# Altium PCB FMCWRev2.PcbDoc
Units mil, origin at the board's own origin, x right, y up, seen from the top; angles counter-clockwise.
Board outline 3805 x 2115 mil, 4 copper layers (Top Layer, GND, PWR, Bottom Layer), stack 26.634 mil thick; 68 components, 38 nets, 335 pads, 169 vias.
Unrouted connection lines stored in the file: 64.
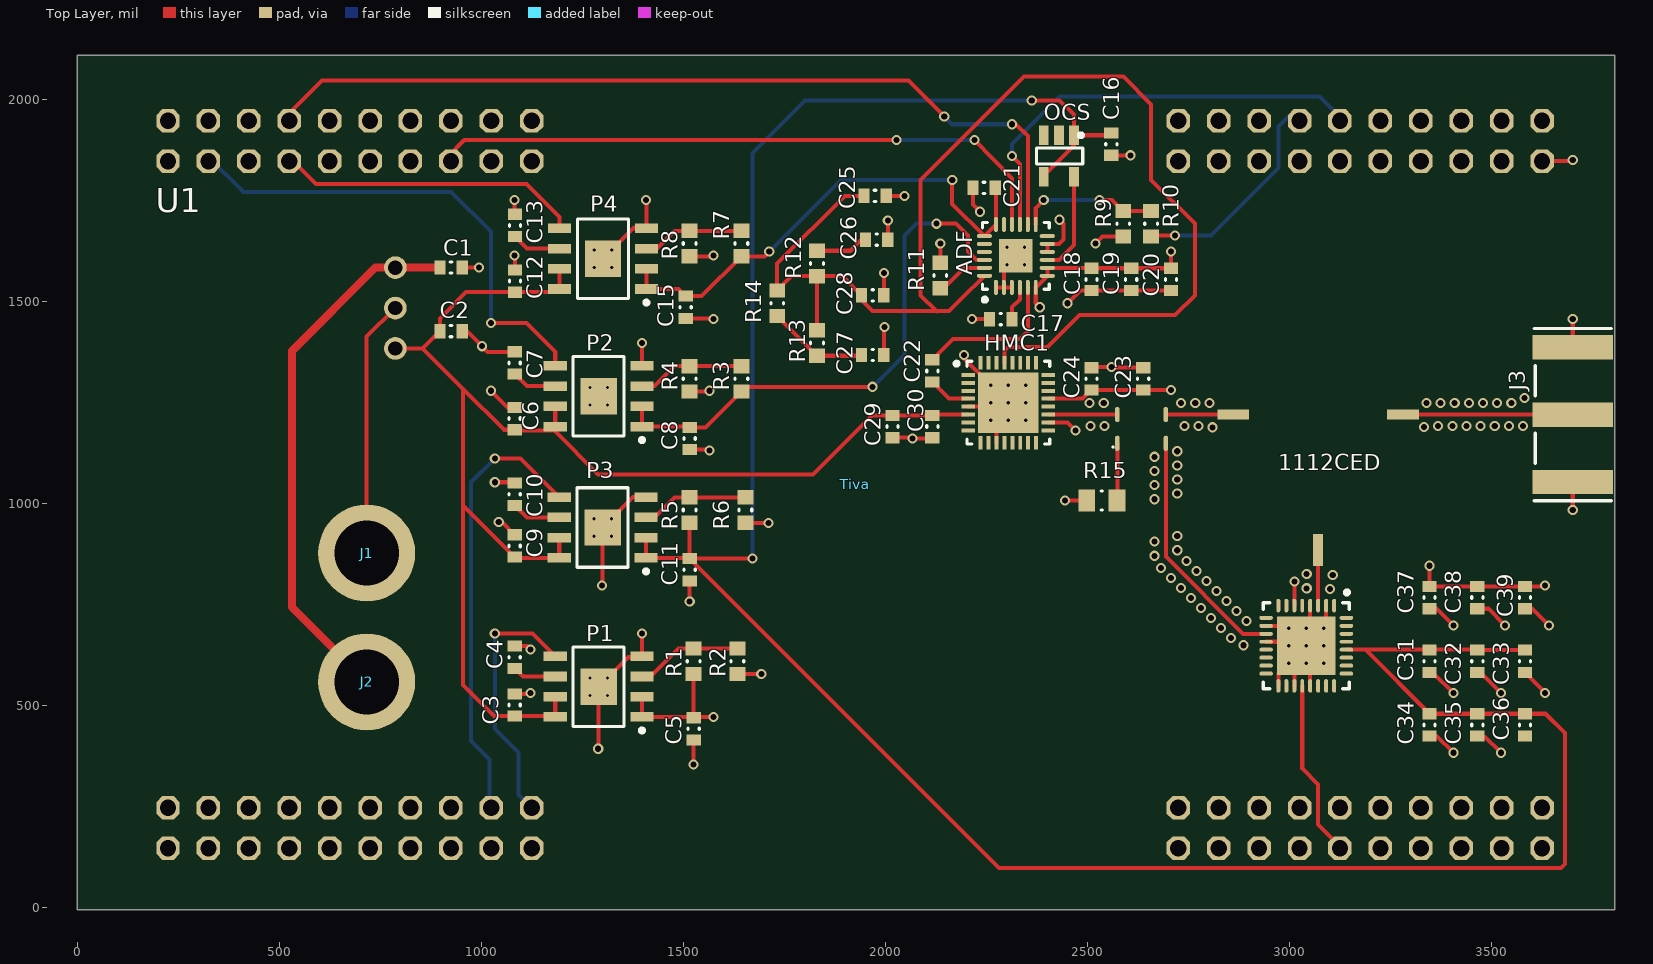
[diagram p0: Top Layer view]
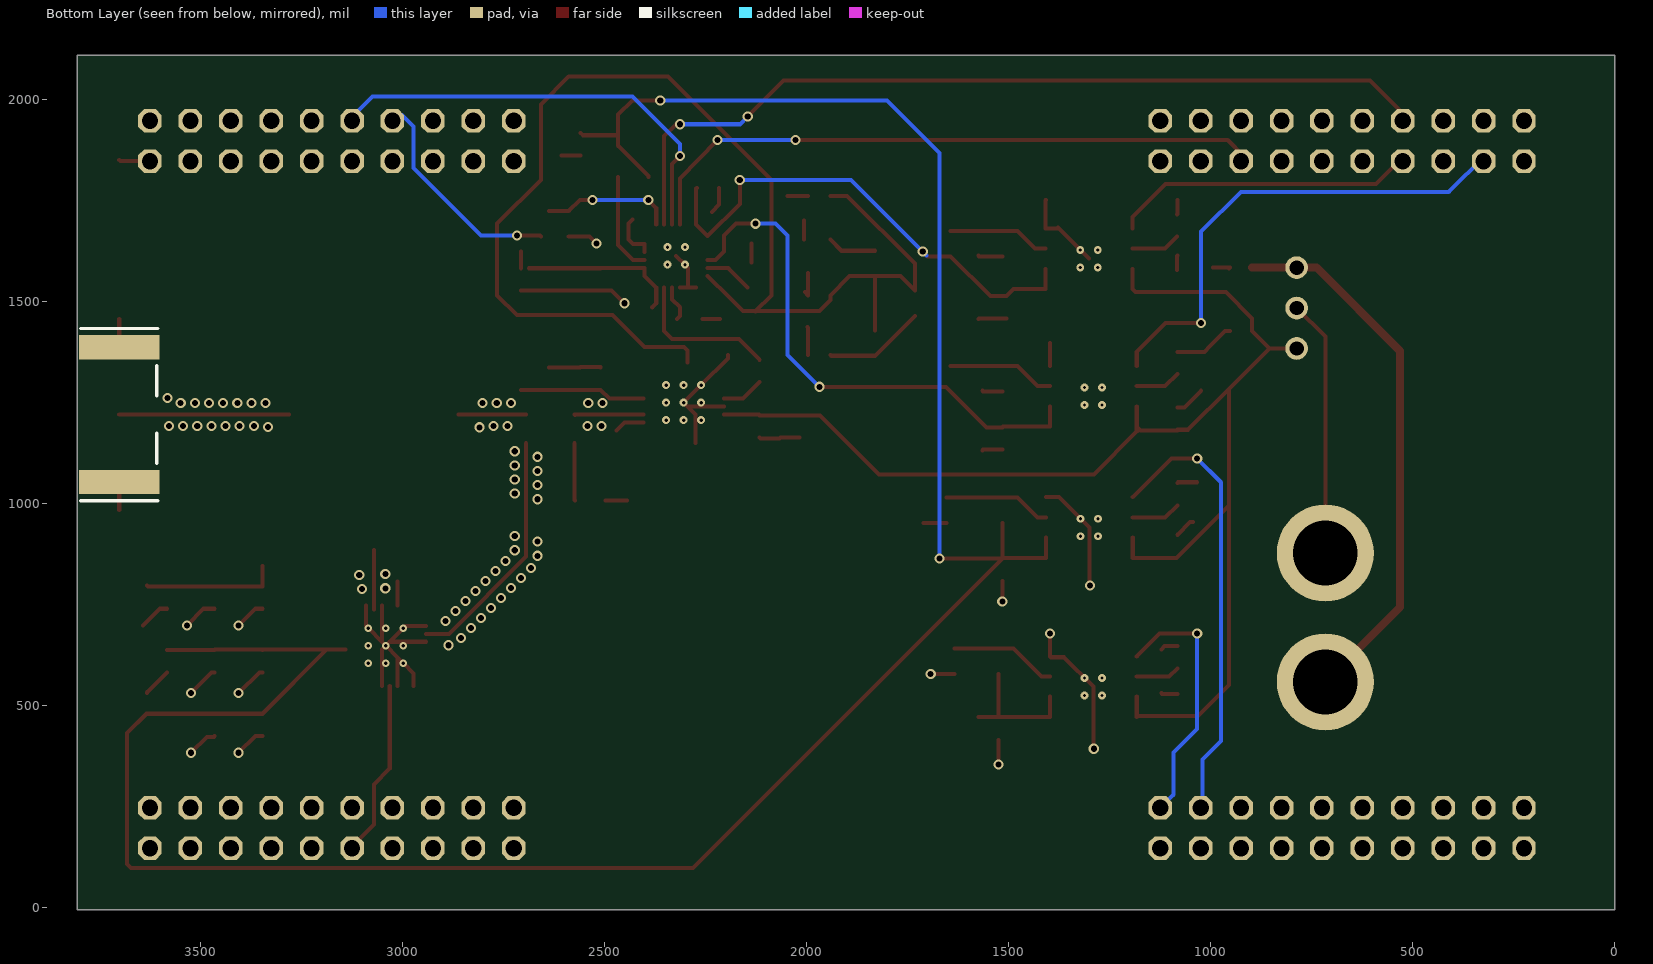
[diagram p1: Bottom Layer view, seen from below]
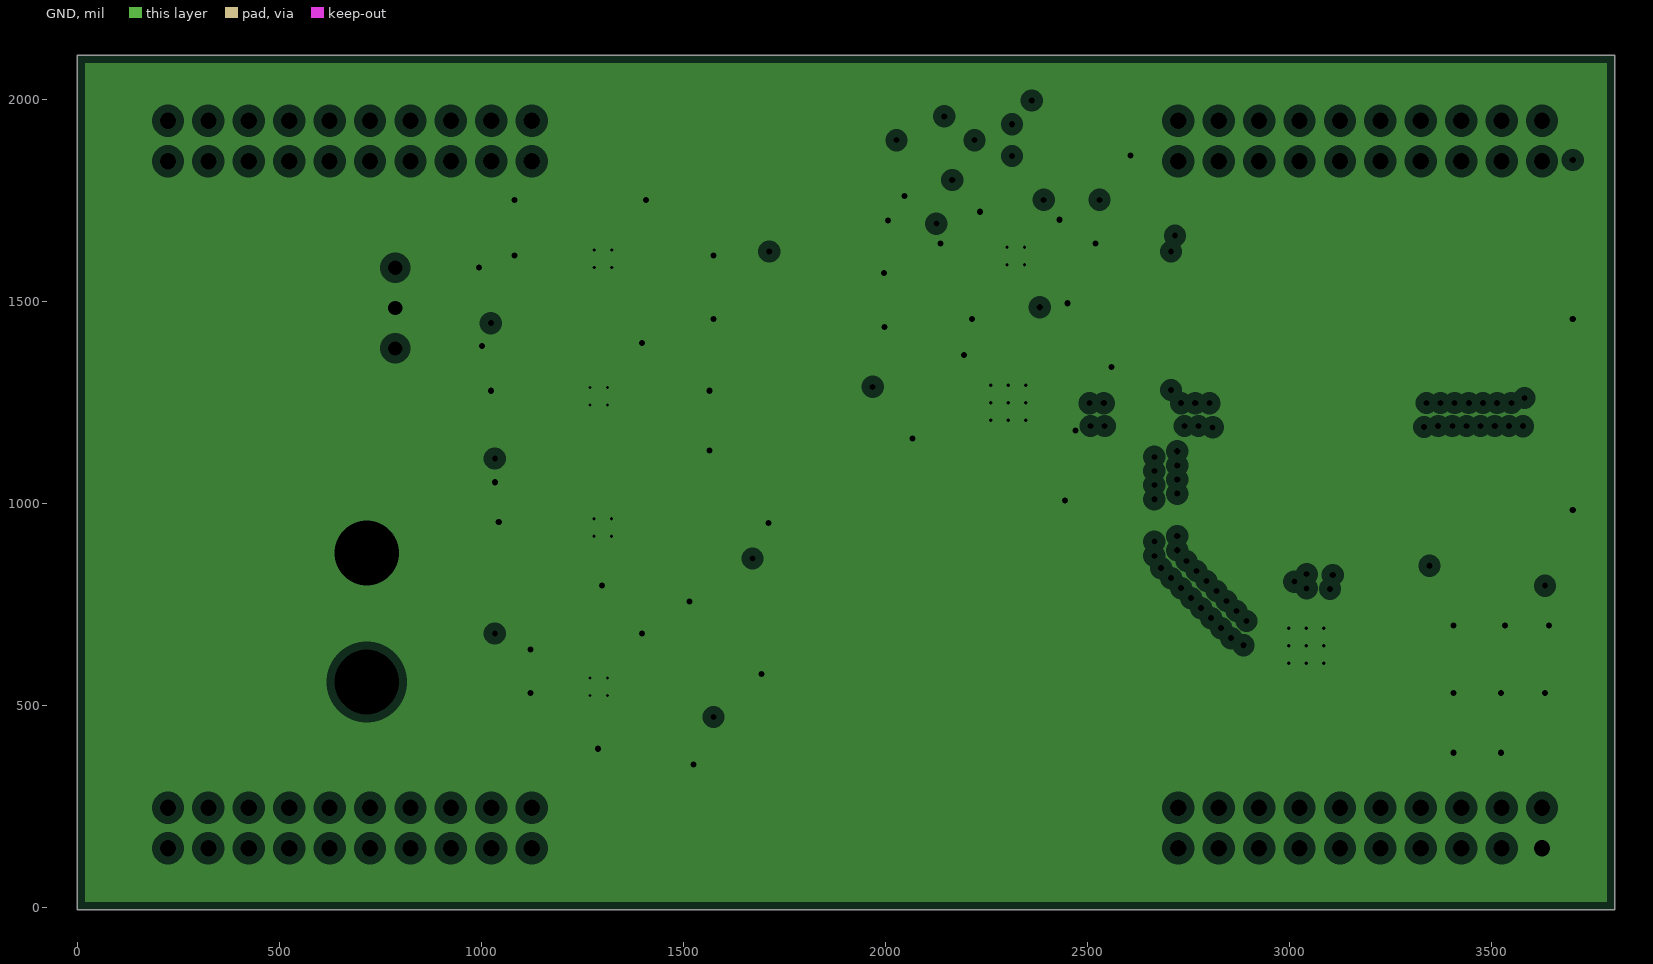
[diagram p2: GND, clearances drawn from the general rule]
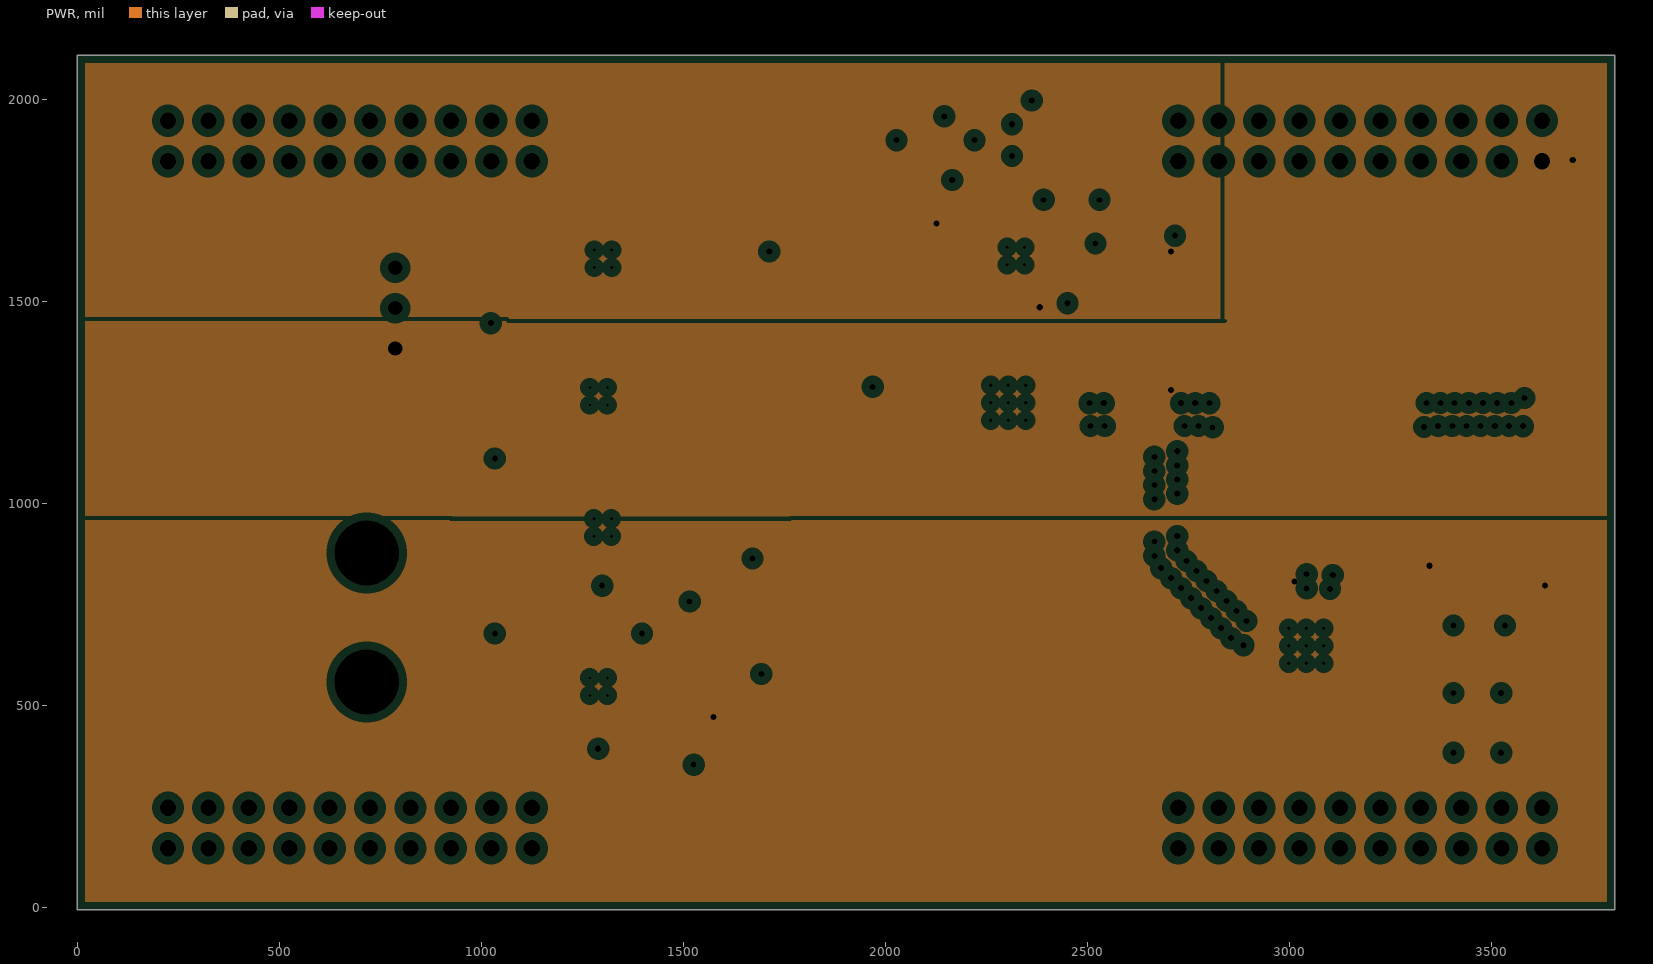
[diagram p3: PWR, clearances drawn from the general rule]

## Layer stack, top to bottom
Top Solder: solder mask 0.4, Solder Resist, Dk 3.5
Top Layer: signal copper 1.4
Dielectric 1: core 8, FR-4, Dk 4.2
GND: plane copper 1.417, net GND
Dielectric 3: prepreg 5, FR-4, Dk 4.2
PWR: plane copper 1.417, net 12V
Dielectric 2: core 8, FR-4, Dk 4.2
Bottom Layer: signal copper 1.4
Bottom Solder: solder mask 0.4, Solder Resist, Dk 3.5

## Board outline
0,-5 3805,-5 3805,2110 0,2110

## Design rules (kind name [scope] priority, off if disabled: settings)
Clearance [All] p1: gap=1 ignorepadtopadclearanceinfootprint=TRUE
ComponentClearance [All] p1: gap=0 collisioncheckmode=3 verticalgap=0 showdistances=FALSE
PlaneClearance [All] p1: clearance=20
PlaneConnect [All] p1: planeconnectstyle=Direct reliefexpansion=20 reliefentries=4 reliefconductorwidth=10 reliefairgap=10
PolygonConnect [All] p1: connectstyle=Direct reliefconductorwidth=10 reliefentries=4 polygonreliefangle="90 Angle" airgapwidth=10
RoomDefinition Sheet1 [InComponentClass('Sheet1')] p1: confinementstyle=ConfineIn formatcopy=TRUE lockcomponents=FALSE outline -1340,-1005 660,-1005 660,-5 -1340,-5
RoomDefinition Sheet3 [InComponentClass('Sheet3')] p2: confinementstyle=ConfineIn formatcopy=TRUE lockcomponents=FALSE outline -1340,-1005 660,-1005 660,-5 -1340,-5
RoomDefinition Sheet2 [InComponentClass('Sheet2')] p3: confinementstyle=ConfineIn formatcopy=TRUE lockcomponents=FALSE outline 4565,5225 9990,5225 9990,5595 4565,5595
RoutingVias [All] p1: holewidth=15 width=25 viastyle="Through Hole" minholewidth=10 minwidth=15 maxholewidth=20 maxwidth=25
SolderMaskExpansion [All] p1: expansion=4
Width Width_2 [(InNet('Antenna') AND InNet('IF') AND InNet('LO') AND InNet('RFOUT') AND InNet('RF') AND InNet('OUT') AND InNet('LOAD'))] p1: maxlimit=11.38 minlimit=11.38 preferedwidth=11.38 impedancedriven=TRUE minimp=50.000000 maximp=50.000000 favimp=50.000000
Width Width_1 [InNet('12V')] p2: maxlimit=19.68 minlimit=9.84 preferedwidth=19.68
Width [All] p3: maxlimit=10 minlimit=10 preferedwidth=10
27 further rules are at their usual default settings.

## Classes and differential pairs
component class Sheet1: C1 C2 C3 C4 C5 C6 C7 C8 C9 C10 C11 C12 C13 C15 J1 J2 P1 P2 P3 P4 R1 R2 R3 R4 R5 R6 R7 R8 Tiva U1
component class Sheet2: ADF C16 C17 C18 C19 C20 C21 C22 C23 C24 C25 C26 C27 C28 C29 C30 HMC1 OCS R9 R10 R11 R12 R13 R14
component class Sheet3: 1 2 1112CED C31 C32 C33 C34 C35 C36 C37 C38 C39 J3 R15

## Components (designator, comment, footprint, x,y, rotation, side; value= is the part's Value field where it differs from the comment)
1 "FPC06077" FPC06077 2633.86,1185.04 r90 top
2 "HMC1113" QFN50P500X500X5_HS-33N 3041.34,648.62 r270 top
1112CED "" PCBComponent_1 3070.87,1210.83 r0 top
ADF "ADF4159" QFN50P400X400X80_HS-25N 2322.83,1613.19 r90 top
C1 "CAP 10uF 16V 0603(1608)" CAPC0603(1608)100_L 925.2,1584.65 r0 top value=10uF
C2 "CAP 22uF 16V 0603(1608)" CAPC0603(1608)100_L 925.2,1427.17 r0 top value=22uF
C3 "CAP 2.2uF 16V 0603(1608)" CAPC0603(1608)100_L 1082.68,501.97 r90 top value=2.2uF
C4 "CAP 1nF 16V 0603(1608)" CAPC0603(1608)100_L 1082.68,620.08 r90 top value=1nF
C5 "CAP 2.2uF 16V 0603(1608)" CAPC0603(1608)100_L 1525.59,442.91 r270 top value=2.2uF
C6 "CAP 2.2uF 16V 0603(1608)" CAPC0603(1608)100_L 1082.68,1210.63 r90 top value=2.2uF
C7 "CAP 1nF 16V 0603(1608)" CAPC0603(1608)100_L 1082.68,1348.43 r90 top value=1nF
C8 "CAP 2.2uF 16V 0603(1608)" CAPC0603(1608)100_L 1515.75,1161.42 r270 top value=2.2uF
C9 "CAP 2.2uF 16V 0603(1608)" CAPC0603(1608)100_L 1082.68,895.67 r90 top value=2.2uF
C10 "CAP 1nF 16V 0603(1608)" CAPC0603(1608)100_L 1082.68,1023.62 r90 top value=1nF
C11 "CAP 2.2uF 16V 0603(1608)" CAPC0603(1608)100_L 1515.75,836.61 r270 top value=2.2uF
C12 "CAP 2.2uF 16V 0603(1608)" CAPC0603(1608)100_L 1083.66,1550.98 r90 top value=2.2uF
C13 "CAP 1nF 16V 0603(1608)" CAPC0603(1608)100_L 1083.66,1688.78 r90 top value=1nF
C15 "CAP 2.2uF 16V 0603(1608)" CAPC0603(1608)100_L 1505.91,1486.22 r270 top value=2.2uF
C16 "CAP 0.1uF 16V 0603(1608)" CAPC0603(1608)100_L 2559.06,1889.76 r270 top value=0.1uF
C17 "CAP 100pF 16V 0603(1608)" CAPC0603(1608)100_L 2285.43,1456.69 r180 top value=100pF
C18 "CAP 10uF 16V 0603(1608)" CAPC0603(1608)100_L 2509.84,1555.12 r270 top value=10uF
C19 "CAP 10uF 16V 0603(1608)" CAPC0603(1608)100_L 2608.27,1555.12 r270 top value=10uF
C20 "CAP 10uF 16V 0603(1608)" CAPC0603(1608)100_L 2706.69,1555.12 r270 top value=10uF
C21 "CAP 10uF 16V 0603(1608)" CAPC0603(1608)100_L 2244.09,1781.5 r180 top value=10uF
C22 "CAP 1000pF 16V 0603(1608)" CAPC0603(1608)100_L 2116.14,1328.74 r270 top value=1000pF
C23 "CAP 2.2uF 16V 0603(1608)" CAPC0603(1608)100_L 2637.8,1309.06 r270 top value=2.2uF
C24 "CAP 100pF 16V 0603(1608)" CAPC0603(1608)100_L 2509.84,1309.06 r270 top value=100pF
C25 "CAP 360pF 16V 0603(1608)" CAPC0603(1608)100_L 1974.41,1761.81 r0 top value=390pF
C26 "CAP 5.6nF 16V 0603(1608)" CAPC0603(1608)100_L 1978.35,1653.54 r180 top value=5.6nF
C27 "CAP 270pF 16V 0603(1608)" CAPC0603(1608)100_L 1968.5,1368.11 r180 top value=270pF
C28 "CAP 270pF 16V 0603(1608)" CAPC0603(1608)100_L 1968.5,1515.75 r180 top value=270pF
C29 "CAP 2.2uF 16V 0603(1608)" CAPC0603(1608)100_L 2017.72,1190.94 r90 top value=2.2uF
C30 "CAP 100pF 16V 0603(1608)" CAPC0603(1608)100_L 2116.14,1190.94 r90 top value=100pF
C31 "CAP 2.2uF 16V 0603(1608)" CAPC0603(1608)100_L 3346.46,610.24 r270 top value=2.2uF
C32 "CAP 10nF 16V 0603(1608)" CAPC0603(1608)100_L 3464.57,610.24 r270 top value=10nF
C33 "CAP 100pF 16V 0603(1608)" CAPC0603(1608)100_L 3582.68,610.24 r270 top value=100pF
C34 "CAP 2.2uF 16V 0603(1608)" CAPC0603(1608)100_L 3346.46,452.76 r270 top value=2.2uF
C35 "CAP 10nF 16V 0603(1608)" CAPC0603(1608)100_L 3464.57,452.76 r270 top value=10nF
C36 "CAP 100pF 16V 0603(1608)" CAPC0603(1608)100_L 3582.68,452.76 r270 top value=100pF
C37 "CAP 100pF 16V 0603(1608)" CAPC0603(1608)100_L 3346.46,767.72 r270 top value=100pF
C38 "CAP 10nF 16V 0603(1608)" CAPC0603(1608)100_L 3464.57,767.72 r270 top value=10nF
C39 "CAP 2.2uF 16V 0603(1608)" CAPC0603(1608)100_L 3582.68,767.72 r270 top value=2.2uF
HMC1 "Component_1" QFN50P500X500X100_HS-33N 2304.13,1250 r0 top
J1 "http://www.powerwerx.com/anderson-powerpoles/" APP45_PCB_HORIZ_RIGHT -393.46,721.7 r0 top
J2 "http://www.powerwerx.com/anderson-powerpoles/" APP45_PCB_HORIZ_RIGHT -393.46,402.81 r0 top
J3 "CONSMA003.062-L" CON-SMA-EDGE062L 3700.79,1220.47 r0 top
OCS "LTC6905IS5-100" TSOP95P280X100-5N 2431.1,1860.24 r270 top
P1 "ADP7142" SOIC127P600X175_HS-9N 1290.35,547.44 r180 top
P2 "ADP7142" SOIC127P600X175_HS-9N 1290.35,1265.94 r180 top
P3 "ADP7142" SOIC127P600X175_HS-9N 1300.2,941.14 r180 top
P4 "ADP7142" SOIC127P600X175_HS-9N 1301.18,1606.3 r180 top
R1 "500 1% 0603(1608)" RESC0603(1608)_N 1525.59,610.24 r270 top value="500 Ohm"
R2 "215 1% 0603(1608)" RESC0603(1608)_N 1633.86,610.24 r90 top value="215 Ohm"
R3 "500 1% 0603(1608)" RESC0603(1608)_N 1643.7,1309.06 r270 top value="500 Ohm"
R4 "287 1% 0603(1608)" RESC0603(1608)_N 1515.75,1309.06 r90 top value="287 Ohm"
R5 "500 1% 0603(1608)" RESC0603(1608)_N 1515.75,984.25 r270 top value="500 Ohm"
R6 "332 1% 0603(1608)" RESC0603(1608)_N 1653.54,984.25 r90 top value="332 Ohm"
R7 "1000 1% 0603(1608)" RESC0603(1608)_N 1643.7,1643.7 r270 top value="1000 Ohm"
R8 "500 1% 0603(1608)" RESC0603(1608)_N 1515.75,1643.7 r90 top value="500 Ohm"
R9 "120 1% 0603(1608)" RESC0603(1608)_N 2588.58,1692.91 r90 top value="120 Ohm"
R10 "100 1% 0603(1608)" RESC0603(1608)_N 2657.48,1692.91 r270 top value="100 Ohm"
R11 "5100 1% 0603(1608)" RESC0603(1608)_N 2135.83,1564.96 r90 top value="5100 Ohm"
R12 "330 1% 0603(1608)" RESC0603(1608)_N 1830.71,1594.49 r270 top value="330 Ohm"
R13 "180 1% 0603(1608)" RESC0603(1608)_N 1830.71,1397.64 r270 top value="180 Ohm"
R14 "180 1% 0603(1608)" RESC0603(1608)_N 1732.28,1496.06 r90 top value="180 Ohm"
R15 "50R 5% 0805(2012)" RESC0805(2012)_N 2535.43,1007.87 r0 top value="50 Ohm"
Tiva "TIVA C CONNECTED LAUNCHPAD" TIVA-C-CONNECTED -1225.2,-202.36 r0 top
U1 "4.95W DC/DC Converter    Manufacturer: Murata" OKI-78SR_HORIZ 787.4,1584.25 r90 top

## Footprints (in the part's own frame and the unit in brackets; to place one, negate y for a bottom-side part, rotate by r counter-clockwise, add the part's x,y. Pads: shape width x height; smd on the part's side, far side on the other; paste and mask are expansions set on the pad)
APP45_PCB_HORIZ_RIGHT [mil]
  round 240 hole 160: P$1(1110,156.25)
CAPC0603(1608)100_L [mm] "Chip Capacitor, Body 1.6x0.8mm, Height 1.0mm, IPC High Density"
  rect 0.7x0.9 smd: 1(-0.7,0) 2(0.7,0)
  silkscreen extent -0.05,-0.35 0.05,0.35, body extent -0.87,-0.47 0.88,0.48, height 1
CON-SMA-EDGE062L [mil] "Connector, SMA Female Edge Mount for 0.062\" Thick Board, Extended, 5-Lead, Body 9.5x7.9mm"
  rect 200x60 smd: 1(0,0) 2(0,-167) 5(0,167)
  rect 200x60 smd far side: 3(0,-167) 4(0,167)
  silkscreen extent -96,-213 96,213, body extent -93,-195 931,195, height 179
FPC06077 [mil] "Chip Array, Concave, 4-Leads, Pitch 3.05mm,  Body 3.20x1.60mm,  IPC Medium Density"
  oval 37.4x12 smd: 1(35.43,60) 2(35.43,-60) 3(-35.43,-60) 4(-35.43,60)
  silkscreen extent -47,68 -43,72, body extent -37,-67 37,67, height 24
OKI-78SR_HORIZ [mil]
  round 56 hole 35.43: 1(0,0) 2(-100,0) 3(-200,0)
PCBComponent_1 [mm]
  rect 2x0.63 smd: 1(-5.334,0.254) 2(5.334,0.254)
  rect 0.63x2 smd: 3(0,-8.255)
QFN50P400X400X80_HS-25N [mm] "QFN, 24-Leads, Body 4.00x4.00mm, Pitch 0.50mm, Thermal Pad 2.10x2.10mm, IPC Medium Density"
  oval 0.95x0.25 smd: 1(-1.975,1.25) 2(-1.975,0.75) 3(-1.975,0.25) 4(-1.975,-0.25) 5(-1.975,-0.75) 6(-1.975,-1.25) 13(1.975,-1.25) 14(1.975,-0.75) 15(1.975,-0.25) 16(1.975,0.25) 17(1.975,0.75) 18(1.975,1.25)
  oval 0.25x0.95 smd: 7(-1.25,-1.975) 8(-0.75,-1.975) 9(-0.25,-1.975) 10(0.25,-1.975) 11(0.75,-1.975) 12(1.25,-1.975) 19(1.25,1.975) 20(0.75,1.975) 21(0.25,1.975) 22(-0.25,1.975) 23(-0.75,1.975) 24(-1.25,1.975)
  rect 2.1x2.1 smd: 25(0,0)
  silkscreen extent -2.87,-2.1 2.1,2.1, body extent -1.97,-1.97 1.97,1.97, height 0.8
QFN50P500X500X5_HS-33N [mm] "QFN, 32-Leads, Body 5.00x5.00mm, Pitch 0.50mm, Thermal Pad 3.65x3.65mm, IPC Medium Density"
  oval 0.85x0.25 smd: 1(-2.525,1.75) 2(-2.525,1.25) 3(-2.525,0.75) 4(-2.525,0.25) 5(-2.525,-0.25) 6(-2.525,-0.75) 7(-2.525,-1.25) 8(-2.525,-1.75) 17(2.525,-1.75) 18(2.525,-1.25) 19(2.525,-0.75) 20(2.525,-0.25) 21(2.525,0.25) 22(2.525,0.75) 23(2.525,1.25) 24(2.525,1.75)
  oval 0.25x0.85 smd: 9(-1.75,-2.525) 10(-1.25,-2.525) 11(-0.75,-2.525) 12(-0.25,-2.525) 13(0.25,-2.525) 14(0.75,-2.525) 15(1.25,-2.525) 16(1.75,-2.525) 25(1.75,2.525) 26(1.25,2.525) 27(0.75,2.525) 28(0.25,2.525) 29(-0.25,2.525) 30(-0.75,2.525) 31(-1.25,2.525) 32(-1.75,2.525)
  rect 3.65x3.65 smd: 33(0,0)
  silkscreen extent -3.47,-2.7 2.7,2.7, body extent -2.55,-2.55 2.55,2.55, height 0.2
QFN50P500X500X100_HS-33N [mm] "QFN, 32-Leads, Body 5.00x5.00mm, Pitch 0.50mm, Thermal Pad 3.80x3.80mm, IPC Medium Density"
  rect 0.85x0.25 smd: 1(-2.525,1.75) 2(-2.525,1.25) 3(-2.525,0.75) 4(-2.525,0.25) 5(-2.525,-0.25) 6(-2.525,-0.75) 7(-2.525,-1.25) 8(-2.525,-1.75) 17(2.525,-1.75) 18(2.525,-1.25) 19(2.525,-0.75) 20(2.525,-0.25) 21(2.525,0.25) 22(2.525,0.75) 23(2.525,1.25) 24(2.525,1.75)
  rect 0.25x0.85 smd: 9(-1.75,-2.525) 10(-1.25,-2.525) 11(-0.75,-2.525) 12(-0.25,-2.525) 13(0.25,-2.525) 14(0.75,-2.525) 15(1.25,-2.525) 16(1.75,-2.525) 25(1.75,2.525) 26(1.25,2.525) 27(0.75,2.525) 28(0.25,2.525) 29(-0.25,2.525) 30(-0.75,2.525) 31(-1.25,2.525) 32(-1.75,2.525)
  rect 3.8x3.8 smd: 33(0,0)
  silkscreen extent -3.37,-2.6 2.6,2.6, body extent -2.45,-2.45 2.45,2.45, height 1
RESC0603(1608)_N [mm] "Chip Resistor, Body 1.6x0.8mm, IPC Medium Density"
  rect 0.9x1 smd: 1(-0.8,0) 2(0.8,0)
  silkscreen extent -0.05,-0.4 0.05,0.4, body extent -0.85,-0.47 0.85,0.47, height 0.6
RESC0805(2012)_N [mm] "Chip Resistor, Body 2.0x1.3mm, IPC Medium Density"
  rect 1.05x1.4 smd: 1(-0.95,0) 2(0.95,0)
  silkscreen extent -0.05,-0.6 0.05,0.6, body extent -1.1,-0.67 1.1,0.68, height 0.7
SOIC127P600X175_HS-9N [mm] "SOIC, 8-Leads, Body 4.90x3.90mm, Pitch 1.27mm, Thermal Pad 2.29x2.29mm, IPC Medium Density"
  rect 1.45x0.6 smd: 1(-2.725,1.905) 2(-2.725,0.635) 3(-2.725,-0.635) 4(-2.725,-1.905) 5(2.725,-1.905) 6(2.725,-0.635) 7(2.725,0.635) 8(2.725,1.905)
  rect 2.29x2.29 smd: 9(0,0)
  silkscreen extent -2.85,-2.5 1.6,2.88, body extent -3,-2.5 3,2.5, height 1.75
TIVA-C-CONNECTED [mil]
  oct 58.09x58.09 hole 40: +3V3_1(2350,2150) +3V3_2(4850,2150) +5V_1(2350,2050) +5V_2(4850,2050) GND_1(2250,2050) GND_2(2350,350) GND_3(4750,2050) GND_4(4850,350) PA4(1550,2050) PA5(1450,2050) PA6(4150,2050) PA7(2050,350) PB2(4050,2150) PB3(3950,2150) PB4(2150,2050) PB5(2050,2050) PC4(4650,2150) PC5(4550,2150) PC6(4450,2150) PC7(4150,2150) PD0(4250,350) PD1(4350,350) PD2(2250,2150) PD3(4250,2150) PD4(1950,2150) PD5(1850,2150) PD7(4250,2050) PE0(4650,2050) PE1(4550,2050) PE2(4450,2050) PE3(4350,2050) PE4(4750,2150) PE5(4350,2150) PF1(4850,450) PF2(4750,450) PF3(4650,450) PG0(4550,450) PG1(2350,450) PH0(1750,450) PH1(1650,450) PH2(4650,350) PH3(4550,350) PK0(1950,2050) PK1(1850,2050) PK2(1750,2050) PK3(1650,2050) PK4(2250,450) PK5(2150,450) PK6(1550,450) PK7(1450,450) PL0(4250,450) PL1(4150,450) PL2(4050,450) PL3(3950,450) PL4(4450,450) PL5(4350,450) PM0(2050,450) PM1(1950,450) PM2(1850,450) PM3(4750,350) PM4(4050,2050) PM5(3950,2050) PM6(1450,350) PM7(2250,350) PN2(4150,350) PN3(4050,350) PN4(1450,2150) PN5(1550,2150) PP0(2150,2150) PP1(2050,2150) PP2(3950,350) PP3(1650,350) PP4(1650,2150) PP5(2150,350) PQ0(1750,2150) PQ1(1550,350) PQ2/PA3(1850,350) PQ3/PA2(1750,350) RST1(1950,350) RST_2(4450,350)
TSOP95P280X100-5N [mm] "TSOP, 5-Leads, Body 2.90x1.63mm, Pitch 0.95mm, IPC Medium Density"
  rect 1.22x0.62 smd: 1(-1.31,0.9) 2(-1.31,-0.05) 3(-1.31,-1) 4(1.31,0.9) 5(1.31,-1)
  silkscreen extent -1.43,-1.45 0.5,1.46, body extent -1.4,-1.45 1.4,1.45, height 1

## Part data
1112CED: library part Component_1
C1 C18 C19 C20 C21: library part CMP-1035-01744-1, "CAP 10uF 16V ±1% 0603 (1608 Metric) Thickness 1mm SMD", Case-EIA=0603, Case-Metric=1608, Rated Voltage="16 V", Tolerance=±1%, Max Thickness="1 mm", Technology=SMT
C2: library part CMP-1035-01744-1, "CAP 22uF 16V ±1% 0603 (1608 Metric) Thickness 1mm SMD", Case-EIA=0603, Case-Metric=1608, Rated Voltage="16 V", Tolerance=±1%, Max Thickness="1 mm", Technology=SMT
C3 C5 C6 C8 C9 C11 C12 C15 C23 C29 C31 C34 C39: library part CMP-1035-01744-1, "CAP 2.2uF 16V ±1% 0603 (1608 Metric) Thickness 1mm SMD", Case-EIA=0603, Case-Metric=1608, Rated Voltage="16 V", Tolerance=±1%, Max Thickness="1 mm", Technology=SMT
C4 C7 C10 C13: library part CMP-1035-01744-1, "CAP 1nF 16V ±1% 0603 (1608 Metric) Thickness 1mm SMD", Case-EIA=0603, Case-Metric=1608, Rated Voltage="16 V", Tolerance=±1%, Max Thickness="1 mm", Technology=SMT
C16: library part CMP-1035-01744-1, "CAP 0.1uF 16V ±1% 0603 (1608 Metric) Thickness 1mm SMD", Case-EIA=0603, Case-Metric=1608, Rated Voltage="16 V", Tolerance=±1%, Max Thickness="1 mm", Technology=SMT
C17 C24 C30 C33 C36 C37: library part CMP-1035-01744-1, "CAP 100pF 16V ±1% 0603 (1608 Metric) Thickness 1mm SMD", Case-EIA=0603, Case-Metric=1608, Rated Voltage="16 V", Tolerance=±1%, Max Thickness="1 mm", Technology=SMT
C22: library part CMP-1035-01744-1, "CAP 1000pF 16V ±1% 0603 (1608 Metric) Thickness 1mm SMD", Case-EIA=0603, Case-Metric=1608, Rated Voltage="16 V", Tolerance=±1%, Max Thickness="1 mm", Technology=SMT
C25: library part CMP-1035-01744-1, "CAP 390pF 16V ±1% 0603 (1608 Metric) Thickness 1mm SMD", Case-EIA=0603, Case-Metric=1608, Rated Voltage="16 V", Tolerance=±1%, Max Thickness="1 mm", Technology=SMT
C26: library part CMP-1035-01744-1, "CAP 5.6nF 16V ±1% 0603 (1608 Metric) Thickness 1mm SMD", Case-EIA=0603, Case-Metric=1608, Rated Voltage="16 V", Tolerance=±1%, Max Thickness="1 mm", Technology=SMT
C27 C28: library part CMP-1035-01744-1, "CAP 270pF 16V ±1% 0603 (1608 Metric) Thickness 1mm SMD", Case-EIA=0603, Case-Metric=1608, Rated Voltage="16 V", Tolerance=±1%, Max Thickness="1 mm", Technology=SMT
C32 C35 C38: library part CMP-1035-01744-1, "CAP 10nF 16V ±1% 0603 (1608 Metric) Thickness 1mm SMD", Case-EIA=0603, Case-Metric=1608, Rated Voltage="16 V", Tolerance=±1%, Max Thickness="1 mm", Technology=SMT
HMC1: "HMC735 IC Schematic", Supplier Part Number 1=1127-1548-ND, Supplier 1=Digi-Key
J1: library part APPPP45_PCB_HORIZ_RIGHT, COLOR1=GN
J2: library part APPPP45_PCB_HORIZ_RIGHT, COLOR1=12V
J3: library part CMP-0168-00039-1, DatasheetVersion="rev1.0, May-2007", PackageReference=CON-SMA-EDGE062L, PackageVersion="rev1.0, May-2007", PCB_Layout="Pads complies with manufacturer's recommendation."
R1 R3 R5 R8: library part CMP-1012-00736-1, "500 0.1W 1% 0603 (1608 Metric)  SMD", Case-EIA=0603, Case-Metric=1608, Power="0.1 W", Tolerance="1 %", Technology=SMT
R2: library part CMP-1012-00736-1, "215 0.1W 1% 0603 (1608 Metric)  SMD", Case-EIA=0603, Case-Metric=1608, Power="0.1 W", Tolerance="1 %", Technology=SMT
R4: library part CMP-1012-00736-1, "287 0.1W 1% 0603 (1608 Metric)  SMD", Case-EIA=0603, Case-Metric=1608, Power="0.1 W", Tolerance="1 %", Technology=SMT
R6: library part CMP-1012-00736-1, "332 0.1W 1% 0603 (1608 Metric)  SMD", Case-EIA=0603, Case-Metric=1608, Power="0.1 W", Tolerance="1 %", Technology=SMT
R7: library part CMP-1012-00736-1, "1000 0.1W 1% 0603 (1608 Metric)  SMD", Case-EIA=0603, Case-Metric=1608, Power="0.1 W", Tolerance="1 %", Technology=SMT
R9: library part CMP-1012-00736-1, "120 0.1W 1% 0603 (1608 Metric)  SMD", Case-EIA=0603, Case-Metric=1608, Power="0.1 W", Tolerance="1 %", Technology=SMT
R10: library part CMP-1012-00736-1, "100 0.1W 1% 0603 (1608 Metric)  SMD", Case-EIA=0603, Case-Metric=1608, Power="0.1 W", Tolerance="1 %", Technology=SMT
R11: library part CMP-1012-00736-1, "5100 0.1W 1% 0603 (1608 Metric)  SMD", Case-EIA=0603, Case-Metric=1608, Power="0.1 W", Tolerance="1 %", Technology=SMT
R12: library part CMP-1012-00736-1, "330 0.1W 1% 0603 (1608 Metric)  SMD", Case-EIA=0603, Case-Metric=1608, Power="0.1 W", Tolerance="1 %", Technology=SMT
R13 R14: library part CMP-1012-00736-1, "180 0.1W 1% 0603 (1608 Metric)  SMD", Case-EIA=0603, Case-Metric=1608, Power="0.1 W", Tolerance="1 %", Technology=SMT
R15: library part CMP-1013-00037-1, "50R 0.125W 5% 0805 (2012 Metric)  SMD", Case-EIA=0805, Case-Metric=2012, Power="0.125 W", Tolerance="5 %", Technology=SMT
Tiva: library part TIVA-1294
U1: library part OKI-78SR-*/1.5-W36?CH, "12 to 5V converter", VOUT=+3v3

## Via types
v1: diameter 25, hole 15, Top Layer to Bottom Layer, 89 vias
v2: diameter 19.68, hole 7.87, Top Layer to Bottom Layer, 38 vias
v3: diameter 25, hole 15, Top Layer to GND, 34 vias
v4: diameter 25, hole 15, Top Layer to PWR, 8 vias

## Nets (pads, with @x,y where several pads share a name; then routed paths per layer and width w, separated by ;. In a path a pad name is that pad's centre, name@x,y a point inside that pad or via, vN(x,y) a via of type N, cw(c..) or ccw(c..) an arc to the next point about the centre after c; other vN are vias at no path point)
1V8: ADF.18 ADF.19 C15.1 C21.1 P4.1 P4.2 R7.2 | length 1250.6
  Top Layer w10: P4.2 P4.1 1488.39,1531.3 C15.1 1545.28,1513.78 R7.2 1700.79,1612.2 v1(1712.6,1624.02) ; v1(2165.35,1801.18) 2165.35,1742.13 ADF.19 ADF.18 2273.62,1753.94 2273.62,1779.53 C21.1
  Bottom Layer w10: 1702.76,1614.17 v1(1712.6,1624.02) 1889.76,1801.18 v1(2165.35,1801.18)
3V: 2.28 2.29 C11.1 C16.1 C31.1 C32.1 C33.1 C34.1 C35.1 C36.1 OCS.1 OCS.5 P3.1 P3.2 R5.2 | length 6384.1
  Top Layer w10: P3.2 P3.1 1513.78,866.14 C11.1 ; R5.2 C11.1 ; v1(1671.26,864.17) C11.1 ; v1(2362.2,1998.03) 2431.1,1998.03 2466.54,1962.6 OCS.1 ; OCS.5 2391.73,1811.02 2466.54,1885.83 OCS.1 ; C16.1 2553.54,1911.81 OCS.1 ; 2.28 3187.99,638.78 3188.98,637.8 ; C31.1 C31.1@3345.47,638.78 ; C33.1 C32.1 3463.58,638.78 C31.1@3345.47,638.78 ; C11.1 2281.5,98.43 3671.26,98.43 3681.1,108.27 3681.1,433.07 3633.86,480.31 C36.1 C35.1 C34.1 3188.98,637.8 ; 3188.98,637.8 3188.98,638.78 C31.1@3345.47,638.78
  Bottom Layer w10: v1(1671.26,864.17) 1671.26,1868.11 1801.18,1998.03 v1(2362.2,1998.03)
3V3: ADF.6 ADF.7 ADF.8 ADF.22 C8.1 C18.1 C19.1 C20.1 P2.1 P2.2 R3.2 | length 1781.6
  Top Layer w10: P2.2 P2.1 1513.78,1190.94 C8.1 1555.12,1188.98 R3.2 1655.51,1289.37 v1(1968.5,1289.37) ; v1(2125.98,1692.91) 2175.2,1692.91 2204.72,1663.39 2204.72,1624.02 2225.39,1603.35 ADF.22 ; v4(2381.89,1486.22) 2372.05,1496.06 ADF.6 ADF.7 ADF.8 2417.43,1583.66 2417.74,1583.35 2509.17,1583.35 C18.1 C19.1 2687.01,1582.68 ; C20.1 v4(2706.69,1624.02)
  Bottom Layer w10: v1(1968.5,1289.37) 2047.24,1368.11 2047.24,1663.39 2076.77,1692.91 v1(2125.98,1692.91)
4V: 2.6 C5.1 C37.1 C38.1 C39.1 P1.1 P1.2 R1.2 | length 729.9
  Top Layer w10: P1.2 P1.1 C5.1@1525.59,472.44 ; R1.2 C5.1@1525.59,472.44 ; v4(1574.8,472.44) C5.1@1525.59,472.44 ; 2.6 v4(3011.81,807.09) ; v4(3346.46,846.46) C37.1 C38.1 C39.1 3629.92,795.28 v4(3631.89,797.24)
5V: C2.1 C3.1 C6.1 C9.1 C12.1 C23.2 C24.2 C29.2 C30.2 HMC1.6 HMC1.21 P1.7 P1.8 P2.7 P2.8 P3.7 P3.8 P4.7 P4.8 Tiva.+5V_2 U1.3 | length 3929.3
  Top Layer w10: U1.3 854.72,1384.25 ; C6.1@1082.68,1181.1 1173.23,1181.1 P2.8 ; C6.1 1055.91,1183.07 954.72,1284.25 ; P1.7 P1.8 1181.1,474.41 C3.1 1031.5,474.41 954.72,551.18 954.72,996.06 ; P2.7 P2.8 ; P3.7 P3.8 1084.65,866.14 C9.1 954.72,996.06 ; P4.7 P4.8 1186.02,1523.43 C12.1 962.4,1523.43 897.64,1458.66 C2.1 854.72,1384.25 ; HMC1.6 2118.11,1220.47 C30.2 C29.2 1966.54,1218.5 1820.87,1072.83 1289.37,1072.83 1183.07,1179.13 P2.8 ; HMC1.21 2488.19,1259.84 C24.2 C23.2 v4(2706.69,1281.5) ; Tiva.+5V_2@3620.47,1848.82 Tiva.+5V_2@3620.47,1862.2 ; Tiva.+5V_2 3698.03,1847.64 v4(3700.79,1850.39) ; 854.72,1384.25 954.72,1284.25 ; 954.72,996.06 954.72,1284.25
  Bottom Layer w10: Tiva.+5V_2@3620.08,1862.2 Tiva.+5V_2@3620.47,1862.2
12V: C1.1 J2.P$1 U1.1 | length 1347.3
  Top Layer w19.68: J2.P$1 531.5,744.09 531.5,1377.95 737.8,1584.25 U1.1 897.24,1584.25 C1.1
Antenna: 1112CED.2 J3.1 | length 420.1
  Top Layer w10: 1112CED.2 3700.43,1220.83 J3.1
  other v1: 3332.95,1189.86 3367.85,1192.47 3402.85,1192.47 3437.85,1192.47 3472.85,1192.47 3507.85,1192.47 3542.85,1192.47 3577.85,1191.88 3338.72,1249.18 3373.72,1249.18 3408.72,1249.18 3443.72,1249.18 3478.72,1249.18 3513.72,1249.18 3548.72,1249.18 3581.34,1261.86
CE: R10.2 Tiva.PD3 | length 548
  Top Layer w10: R10.2 2659.45,1663.39 v1(2716.54,1663.39)
  Bottom Layer w10: v1(2716.54,1663.39) 2805.12,1663.39 2972.44,1830.71 2972.44,1933.86 3000.79,1962.2 Tiva.PD3@3020.47,1962.2
CLK: ADF.14 Tiva.PQ0 | length 2142.7
  Top Layer w10: Tiva.PQ0@520.47,1962.2 605.51,2047.24 2057.09,2047.24 v1(2145.67,1958.66) ; v1(2312.99,1938.98) 2322.83,1938.98 2352.36,1909.45 ADF.14
  Bottom Layer w10: v1(2145.67,1958.66) 2165.35,1938.98 v1(2312.99,1938.98)
CP: ADF.24 C25.1 C28.2 HMC1.29 R12.2 R13.1 R14.2 | length 3209.5
  Top Layer w10: R13.1 R12.2 ; C25.1@1940.95,1761.81 1899.61,1761.81 1732.28,1594.49 R14.2 1767.72,1562.99 R12.2 ; ADF.24 2189.96,1508.86 2157.48,1476.38 2127.95,1476.38 ; HMC1.29 2294.29,1378.94 2303.15,1387.8 2401.57,1387.8 2480.31,1466.54 2716.54,1466.54 2765.75,1515.75 2765.75,1692.91 2657.48,1801.18 2657.48,1988.19 2588.58,2057.09 2342.52,2057.09 2086.61,1801.18 2086.61,1515.75 2125.98,1476.38 ; R12.2 1893.7,1562.99 C28.2 1940.94,1503.94 1968.5,1476.38 2125.98,1476.38 ; 2125.98,1476.38 2127.95,1476.38 ; 2125.98,1476.38 2126.97,1475.39 2127.95,1476.38
EN: P1.5 Tiva.PG1 | length 642.4
  Top Layer w10: v1(1033.46,679.13) 1126.38,679.13 P1.5
  Bottom Layer w10: v1(1033.46,679.13) 1033.46,442.91 1092.52,383.86 1092.52,279.92 Tiva.PG1
EN1: P2.5 Tiva.PA4 | length 1231.6
  Top Layer w10: v1(1023.62,1446.85) 1112.2,1446.85 1183.07,1375.98 P2.5
  Bottom Layer w10: Tiva.PA4@320.47,1862.2 411.02,1771.65 925.2,1771.65 1023.62,1673.23 v1(1023.62,1446.85)
EN2: P3.5 Tiva.PK4 | length 1092.8
  Top Layer w10: v1(1033.46,1112.2) 1096.85,1112.2 P3.5
  Bottom Layer w10: Tiva.PK4@1020.47,262.2 1020.47,367.32 974.41,413.39 974.41,1053.15 v1(1033.46,1112.2)
EN3: P4.5 Tiva.PK2 | length 765
  Top Layer w10: Tiva.PK2@520.47,1862.2 591.34,1791.34 1112.2,1791.34 1193.9,1709.65 P4.5
GND: 2.2 2.4 2.10 2.12 2.17 2.19 2.21 2.33 ADF.1 ADF.2 ADF.3 ADF.10 ADF.11 ADF.25 C1.2 C2.2 C3.2 C4.2 C5.2 C6.2 C7.2 C8.2 C9.2 C10.2 C11.2 C12.2 C13.2 C15.2 C16.2 C17.2 C18.2 C19.2 C20.2 C21.2 C23.1 C24.1 C25.2 C26.1 C27.1 C28.1 C29.1 C30.1 C31.2 C32.2 C33.2 C34.2 C35.2 C36.2 C37.2 C38.2 C39.2 HMC1.5 HMC1.11 HMC1.18 HMC1.33 J1.P$1 J3.2 J3.3 J3.4 J3.5 OCS.2 P1.4 P1.9 P2.4 P2.9 P3.4 P3.9 P4.4 P4.9 R2.1 R4.1 R6.1 R8.1 R9.1 R11.2 R15.1 Tiva.GND_4 U1.2 | length 5748.1
  Top Layer w10: J1.P$1 716.54,1413.39 U1.2 ; C2.2 964.57,1427.17 v3(1001.97,1389.76) 1015.75,1375.98 C7.2 ; C1.2 954.72,1582.68 956.69,1584.65 v3(994.09,1584.65) ; v3(1023.62,1279.53) 1064.96,1238.19 C6.2 ; v3(1033.46,1053.15) 1080.71,1053.15 C10.2 ; v3(1043.31,954.72) 1051.18,954.72 C9.2 ; C3.2 1120.08,529.53 v3(1122.05,531.5) ; C4.2 1114.17,647.64 v3(1122.05,639.76) ; v3(1082.68,1614.17) 1083.66,1613.19 C12.2 ; v3(1082.68,1751.97) 1082.68,1717.32 C13.2 ; v1(1289.37,393.7) 1290.35,394.69 P1.9 1362.99,620.08 1395.28,620.08 P1.4 v1(1397.64,679.13) ; v1(1299.21,797.24) 1300.2,798.23 P3.9 1375.2,1016.14 P3.4 ; P4.9 1377.95,1683.07 1379.72,1681.3 P4.4 1408.46,1750.98 v3(1407.48,1751.97) ; P2.4 v3(1397.64,1397.64) ; C15.2 1572.83,1458.66 v3(1574.8,1456.69) ; v1(1515.75,757.87) C11.2 ; C8.2 1562.99,1133.86 v3(1564.96,1131.89) ; R4.1 1562.99,1277.56 v3(1564.96,1279.53) ; R8.1 1572.83,1612.2 v3(1574.8,1614.17) ; v1(1525.59,354.33) C5.2 ; R2.1 v1(1692.91,578.74) ; R6.1 v3(1710.63,952.76) ; C27.1 1996.06,1435.04 v3(1998.03,1437.01) ; v3(1996.06,1570.87) C28.1 C28.1@2003.94,1523.62 ; C25.2@1996.06,1761.81 C25.2 v3(2047.24,1761.81) ; C26.1 v3(2005.91,1700.79) ; C29.1 2064.96,1163.39 v3(2066.93,1161.42) 2114.17,1161.42 C30.1 ; R11.2 v3(2135.83,1643.7) ; v3(2194.88,1368.11) 2194.88,1359.25 v2(2260.83,1293.31) v2(2304.13,1250) HMC1.33@2294.29,1240.16 ; HMC1.5 HMC1.33@2294.29,1240.16 ; v3(2214.57,1456.69) C17.2 ; C21.2 2216.54,1740.16 v3(2234.25,1722.44) ; ADF.1 ADF.2 ; HMC1.11 2274.61,1220.47 HMC1.33@2294.29,1240.16 ; ADF.3 ADF.2 ; ADF.25 v2(2301.18,1591.54) 2293.31,1583.66 ADF.2 ; ADF.10 ADF.11 2430.12,1642.72 2440.94,1653.54 2440.94,1692.91 v3(2431.1,1702.76) ; HMC1.18 2450.79,1200.79 v3(2470.47,1181.1) ; v3(2444.88,1007.87) R15.1 ; v1(2450.79,1496.06) 2482.28,1527.56 C18.2 C19.2 C20.2 ; C24.1 2509.84,1338.58 v3(2559.06,1338.58) 2561.02,1336.61 C23.1 ; v1(2519.68,1643.7) 2537.4,1661.42 R9.1 ; C16.2 v3(2606.3,1862.2) ; 2.12 2.33@3031.5,658.46 ; 2.10 2.33@2992.13,697.83 ; 2.17 2972.44,579.72 v2(2998.03,605.32) 2.33@3011.81,619.09 ; v2(2998.03,691.93) 2.33@3031.5,658.46 ; 2.19 2.33@3011.81,619.09 ; 2.21 3051.18,638.78 v2(3041.34,648.62) ; 2.4 2.33@3051.18,658.46 ; 2.2 3090.55,697.83 v2(3084.65,691.93) 2.33@3051.18,658.46 ; C34.2 3364.17,425.2 v1(3405.51,383.86) ; C31.2 3354.33,582.68 v1(3405.51,531.5) ; C37.2 3364.17,740.16 v1(3405.51,698.82) ; C35.2 3466.54,423.23 3484.25,423.23 v1(3523.62,383.86) ; C32.2 3472.44,582.68 v1(3523.62,531.5) ; C38.2 3492.13,740.16 v1(3533.46,698.82) ; C33.2 3631.89,533.46 v3(3631.89,531.5) ; C39.2 3600.39,740.16 v3(3641.73,698.82) ; v3(3700.79,984.25) J3.2 ; J3.5 v3(3700.79,1456.69) ; 2.33@3011.81,619.09 v2(3041.34,648.62) ; 2.33@3031.5,658.46 v2(3041.34,648.62) ; v2(3041.34,648.62) 2.33@3051.18,658.46
  other v2: 1268.7,525.79 1312.01,525.79 1268.7,569.09 1312.01,569.09 3041.34,605.32 3084.65,605.32 2998.03,648.62 3084.65,648.62 3041.34,691.93 1278.54,919.49 1321.85,919.49 1278.54,962.8 1321.85,962.8 2260.83,1206.69 2304.13,1206.69 2347.44,1206.69 1268.7,1244.29 1312.01,1244.29 2260.83,1250 2347.44,1250 1268.7,1287.6 1312.01,1287.6 2304.13,1293.31 2347.44,1293.31 1279.53,1584.65 1322.83,1584.65 2344.49,1591.54 1279.53,1627.95 1322.83,1627.95 2301.18,1634.84 2344.49,1634.84
IF: 2.20 Tiva.PD1 | length 426.9
  Top Layer w10: 2.20 3031.5,344.49 3070.87,305.12 3070.87,206.69 3115.35,162.2 Tiva.PD1@3120.47,162.2
LE: ADF.16 Tiva.PB4 | length 1561.9
  Top Layer w10: Tiva.PB4@920.47,1862.2 957.87,1899.61 v1(2027.56,1899.61) ; v1(2220.47,1899.61) 2312.99,1805.12 ADF.16
  Bottom Layer w10: v1(2027.56,1899.61) v1(2220.47,1899.61)
LO: 1.3 2.11 | length 607.7
  Top Layer w10: 1.3 2693.86,869.13 2884.84,678.15 2.11
  other v1: 2885.97,649.8 2855.63,667.26 2830.89,692.01 2893.34,709.74 2806.14,716.76 2868.6,734.49 2781.39,741.51 2843.85,759.24 2756.64,766.26 2819.1,783.99 2731.89,791 2794.35,808.74 2707.14,815.75 2769.6,833.49 2682.39,840.5 2744.85,858.24 2665.51,871.16 2722.21,884.93 2665.51,906.16 2722.21,919.93 2665.51,1011.16 2722.21,1024.93 2665.51,1046.16 2722.21,1059.93 2665.51,1081.16 2722.21,1094.93 2665.51,1116.16 2722.21,1129.93
LOAD: 1.4 R15.2 | length 142.2
  Top Layer w10: R15.2 2573.86,1008.9 1.4
MOSI: ADF.15 Tiva.PE5 | length 1082.9
  Top Layer w10: v1(2312.99,1860.24) 2332.68,1840.55 ADF.15
  Bottom Layer w10: v1(2312.99,1860.24) 2312.99,1889.76 2431.29,2008.06 2715.08,2008.06 2715.26,2007.87 2778.44,2007.87 2778.62,2008.06 2815.08,2008.06 2815.26,2007.87 2878.44,2007.87 2878.62,2008.06 2915.08,2008.06 2915.26,2007.87 2978.44,2007.87 2978.62,2008.06 3074.61,2008.06 Tiva.PE5@3120.47,1962.2
NetADF_4: ADF.4 C17.1 | length 90.2
  Top Layer w10: C17.1@2320.87,1456.69 2312.99,1464.57 2312.99,1486.22 2332.68,1505.91 ADF.4
NetADF_13: ADF.13 R9.2 R10.1 | length 326.7
  Top Layer w10: ADF.13 2372.05,1732.28 v1(2391.73,1751.97) ; v1(2529.53,1751.97) 2561.02,1751.97 R9.2 2637.8,1724.41
  Bottom Layer w10: v1(2391.73,1751.97) v1(2529.53,1751.97)
NetADF_23: ADF.23 R11.1 | length 119.4
  Top Layer w10: R11.1@2145.67,1535.43 2193.9,1583.66 ADF.23
NetC4_1: C4.1 P1.6 | length 108.7
  Top Layer w10: C4.1 1102.76,572.44 P1.6
NetC7_1: C7.1 P2.6 | length 112.8
  Top Layer w10: C7.1 1112.6,1290.94 P2.6
NetC10_1: C10.1 P3.6 | length 122.6
  Top Layer w10: C10.1 1112.6,966.14 P3.6
NetC13_1: C13.1 P4.6 | length 122.6
  Top Layer w10: C13.1 1113.58,1631.3 P4.6
NetC26_2: C26.2 R12.1 | length 121.7
  Top Layer w10: R12.1 1913.39,1625.98 C26.2@1940.94,1653.54
NetC27_2: C27.2 R13.2 R14.1 | length 250.2
  Top Layer w10: R14.1 R13.2 1938.98,1366.14 C27.2
NetP1_3: P1.3 R1.1 R2.2 | length 264.9
  Top Layer w10: P1.3 1418.9,572.44 1488.19,641.73 R1.1 R2.2
NetP2_3: P2.3 R3.1 R4.2 | length 266.6
  Top Layer w10: P2.3 1428.74,1290.94 1478.35,1340.55 R4.2 R3.1
NetP3_3: P3.3 R5.1 R6.2 | length 266.6
  Top Layer w10: P3.3 1428.74,966.14 1478.35,1015.75 R5.1 R6.2
NetP4_3: P4.3 R7.1 R8.2 | length 253.4
  Top Layer w10: P4.3 1434.45,1631.3 1478.35,1675.2 R8.2 R7.1
OUT: 1.2 1112CED.1 | length 167.2
  Top Layer w10: 1.2 2860.51,1220.47 1112CED.1
  other v1: 2809.88,1189.13 2740,1192.12 2775,1192.12 2731.7,1248.83 2766.7,1248.83 2801.7,1248.83
REF: ADF.9 OCS.4 | length 249.9
  Top Layer w10: ADF.9 2430.12,1603.35 2466.54,1639.76 OCS.4
RF: 2.3 1112CED.3 | length 147.6
  Top Layer w10: 2.3@3070.87,738.19 2.3 1112CED.3
  other v1: 3100.39,789.37 3042.51,790.74 3106.97,823.75 3042.51,825.74
RF/4: ADF.5 C22.1 C22.2 HMC1.4 | length 479.5
  Top Layer w10: C22.2 2157.48,1259.84 HMC1.4 ; C22.1 2167.32,1407.48 2332.68,1407.48 2352.36,1427.17 ADF.5
RFOUT: 1.1 HMC1.19 | length 166
  Top Layer w10: HMC1.19 2435.28,1220.47 ; 2440.94,1220.47 1.1 1.1@2572.87,1219.49
  other v1: 2507.64,1192.12 2542.64,1192.12 2505.36,1248.83 2540.36,1248.83
pads on no net: 2.1 2.5 2.7 2.8 2.9 2.13 2.14 2.15 2.16 2.18 2.22 2.23 2.24 2.25 2.26 2.27 2.30 2.31 2.32 ADF.12 ADF.17 ADF.20 ADF.21 HMC1.1 HMC1.2 HMC1.3 HMC1.7 HMC1.8 HMC1.9 HMC1.10 HMC1.12 HMC1.13 HMC1.14 HMC1.15 HMC1.16 HMC1.17 HMC1.20 HMC1.22 HMC1.23 HMC1.24 HMC1.25 HMC1.26 HMC1.27 HMC1.28 HMC1.30 HMC1.31 HMC1.32 OCS.3 Tiva.+3V3_1 Tiva.+3V3_2 Tiva.+5V_1 Tiva.GND_1 Tiva.GND_2 Tiva.GND_3 Tiva.PA5 Tiva.PA6 Tiva.PA7 Tiva.PB2 Tiva.PB3 Tiva.PB5 Tiva.PC4 Tiva.PC5 Tiva.PC6 Tiva.PC7 Tiva.PD0 Tiva.PD2 Tiva.PD4 Tiva.PD5 Tiva.PD7 Tiva.PE0 Tiva.PE1 Tiva.PE2 Tiva.PE3 Tiva.PE4 Tiva.PF1 Tiva.PF2 Tiva.PF3 Tiva.PG0 Tiva.PH0 Tiva.PH1 Tiva.PH2 Tiva.PH3 Tiva.PK0 Tiva.PK1 Tiva.PK3 Tiva.PK5 Tiva.PK6 Tiva.PK7 Tiva.PL0 Tiva.PL1 Tiva.PL2 Tiva.PL3 Tiva.PL4 Tiva.PL5 Tiva.PM0 Tiva.PM1 Tiva.PM2 Tiva.PM3 Tiva.PM4 Tiva.PM5 Tiva.PM6 Tiva.PM7 Tiva.PN2 Tiva.PN3 Tiva.PN4 Tiva.PN5 Tiva.PP0 Tiva.PP1 Tiva.PP2 Tiva.PP3 Tiva.PP4 Tiva.PP5 Tiva.PQ1 Tiva.PQ2/PA3 Tiva.PQ3/PA2 Tiva.RST1 Tiva.RST_2

## Polygon pours and split planes (outlines as drawn)
GND on GND (split plane): 3784.9,15.1 20.1,15.1 20.1,2089.9 3784.9,2089.9
3V3 on PWR (split plane): 2829.55,1457.08 1069.81,1457.08 1066.6,1460.3 1064.94,1461.4 1062.99,1461.79 20.1,1461.79 20.1,2089.9 2829.55,2089.9
5V on PWR (split plane): 3784.9,969.66 1765.35,969.66 1763.4,969.28 1761.75,968.17 1761.47,967.89 928.99,967.89 928.8,968.17 927.15,969.28 925.2,969.66 20.1,969.66 20.1,1451.59 1060.88,1451.59 1064.1,1448.38 1065.75,1447.27 1067.7,1446.89 2839.74,1446.89 2841.69,1447.27 2843.35,1448.38 2844.45,1450.03 2844.84,1451.98 2844.45,1453.93 2843.35,1455.59 2841.69,1456.69 2839.74,1457.08 2839.74,2089.9 3784.9,2089.9
4V on PWR (split plane): 3784.9,15.1 20.1,15.1 20.1,959.47 921.41,959.47 921.59,959.19 923.25,958.09 925.2,957.7 1763.58,957.7 1765.53,958.09 1767.19,959.19 1767.47,959.47 3784.9,959.47

## Other copper
PWR (plane layer: these items are gaps in the copper):
  lines w10: 0,1259.84 0,964.57 925.2,964.57 ; 0,1751.97 0,1456.69 66.44,1456.69 123.65,1456.69 198.7,1456.69 265.75,1456.69 1062.99,1456.69 1067.7,1451.98 2839.74,1451.98 ; 925.2,962.8 1763.58,962.8 1765.35,964.57 1825.79,964.57 1894.69,964.57 1958.66,964.57 3805,964.57 3805,836.61 ; 2834.65,1451.98 2834.65,2110 ; 3800.29,1451.98 3805,1456.69